# Altium PCB SWS_LEFT.PcbDoc (part 1 of 2)
Units mm, origin at the board's own origin, x right, y up, seen from the top; angles counter-clockwise.
Board outline 46.01 x 38 mm, 4 copper layers (Top Layer, Layer 1, Layer 2, Bottom Layer), stack 0.603 mm thick; 110 components, 82 nets, 355 pads, 130 vias.
Unrouted connection lines stored in the file: 5.
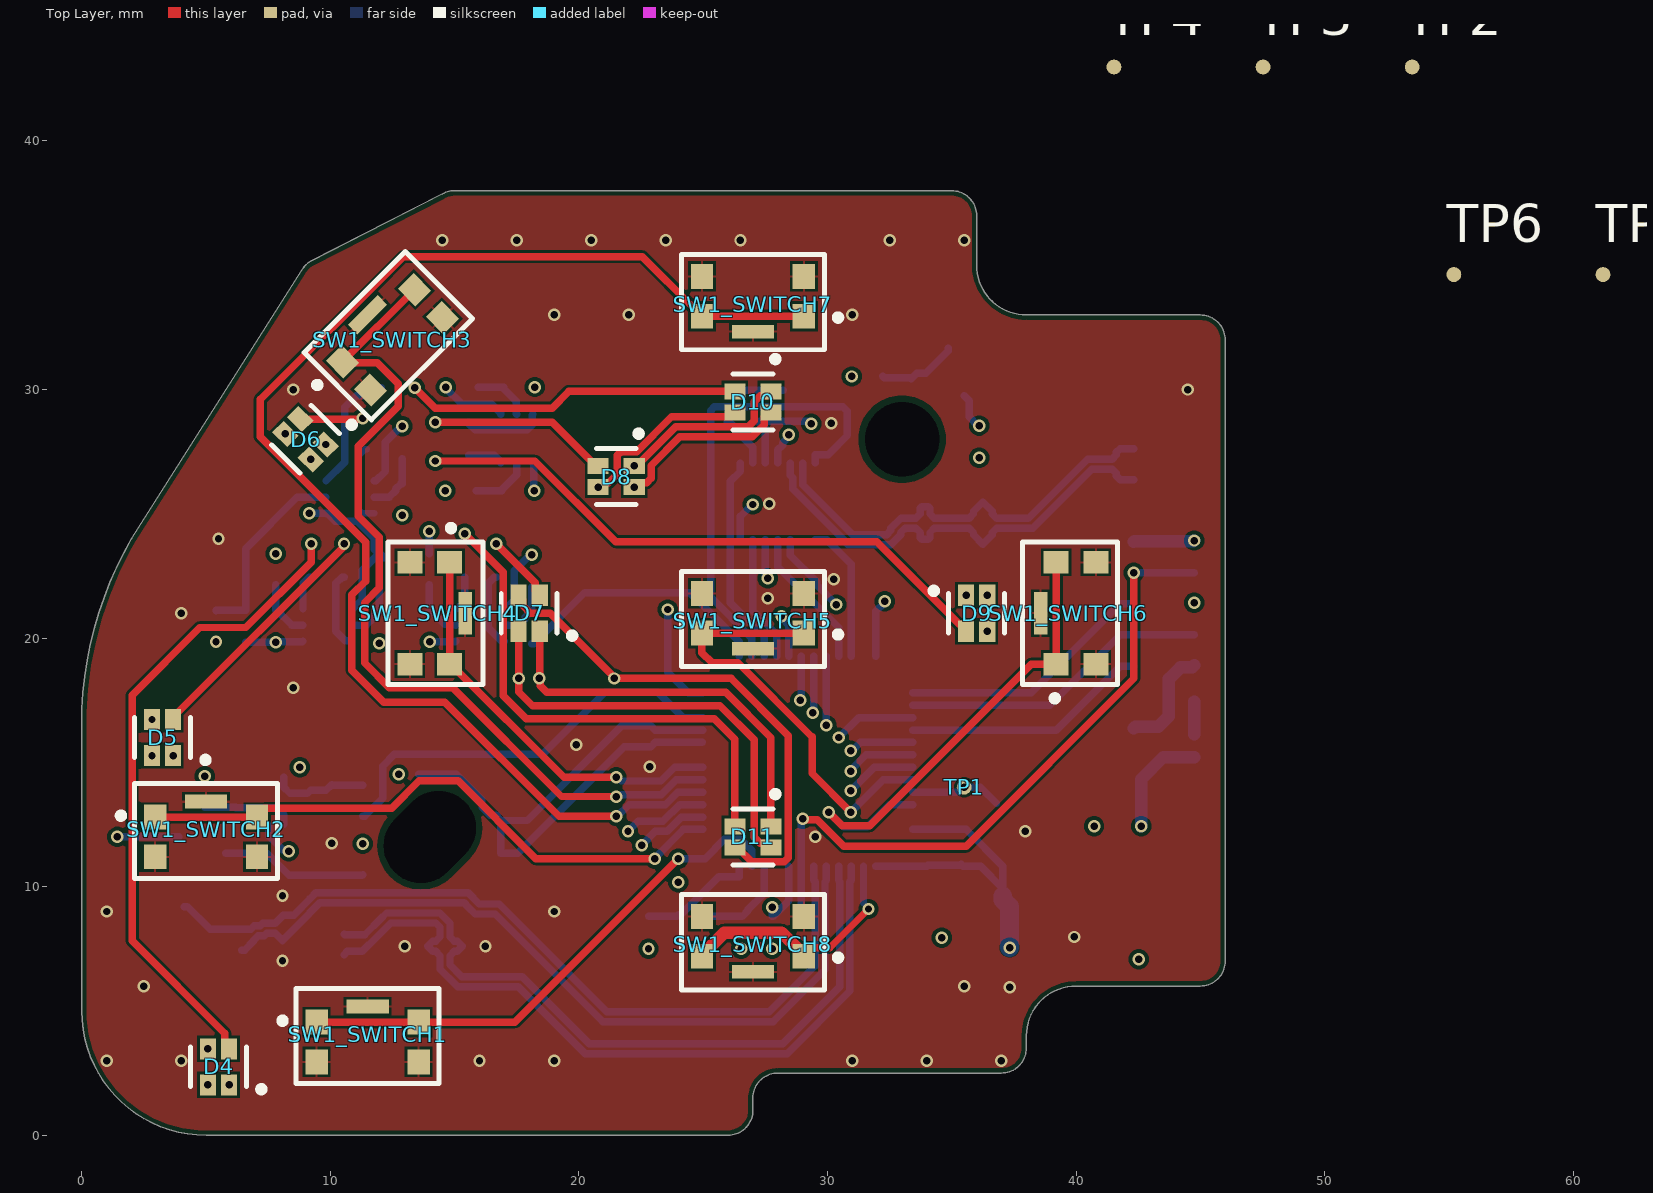
[diagram p0: Top Layer view]
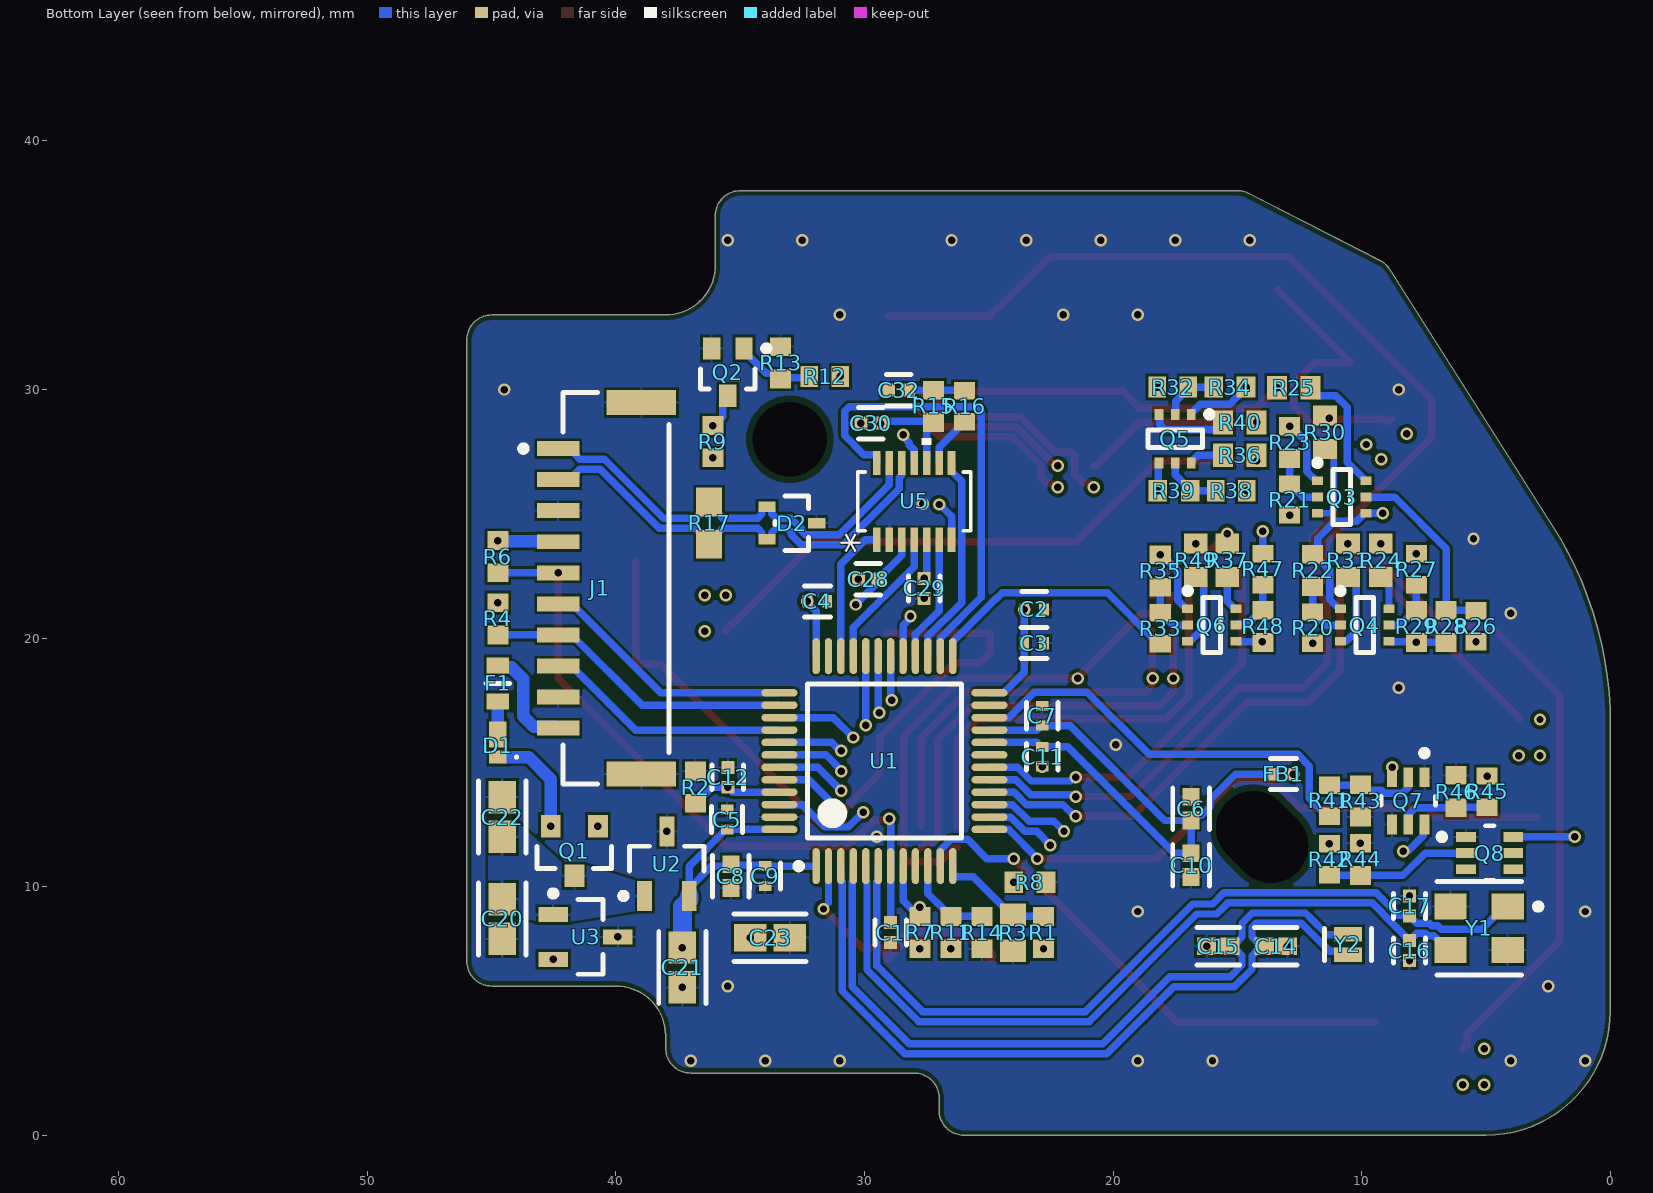
[diagram p1: Bottom Layer view, seen from below]
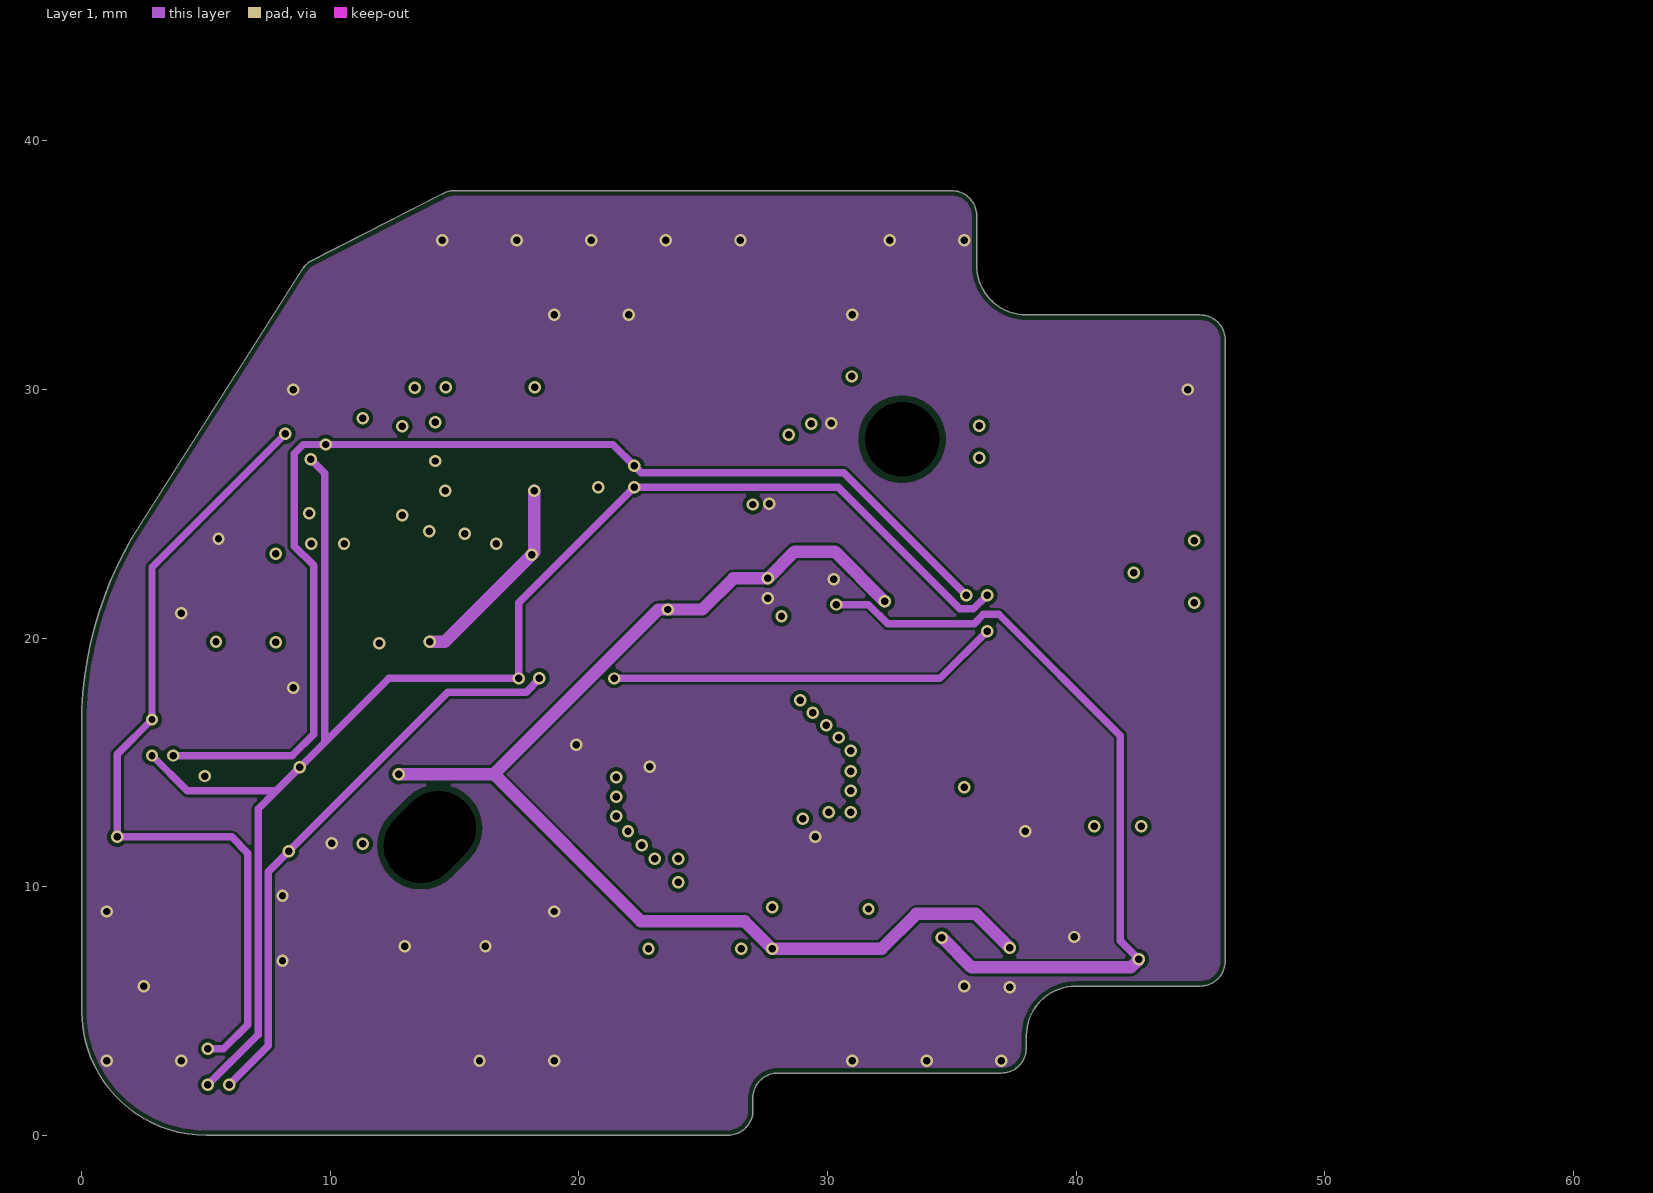
[diagram p2: Layer 1]
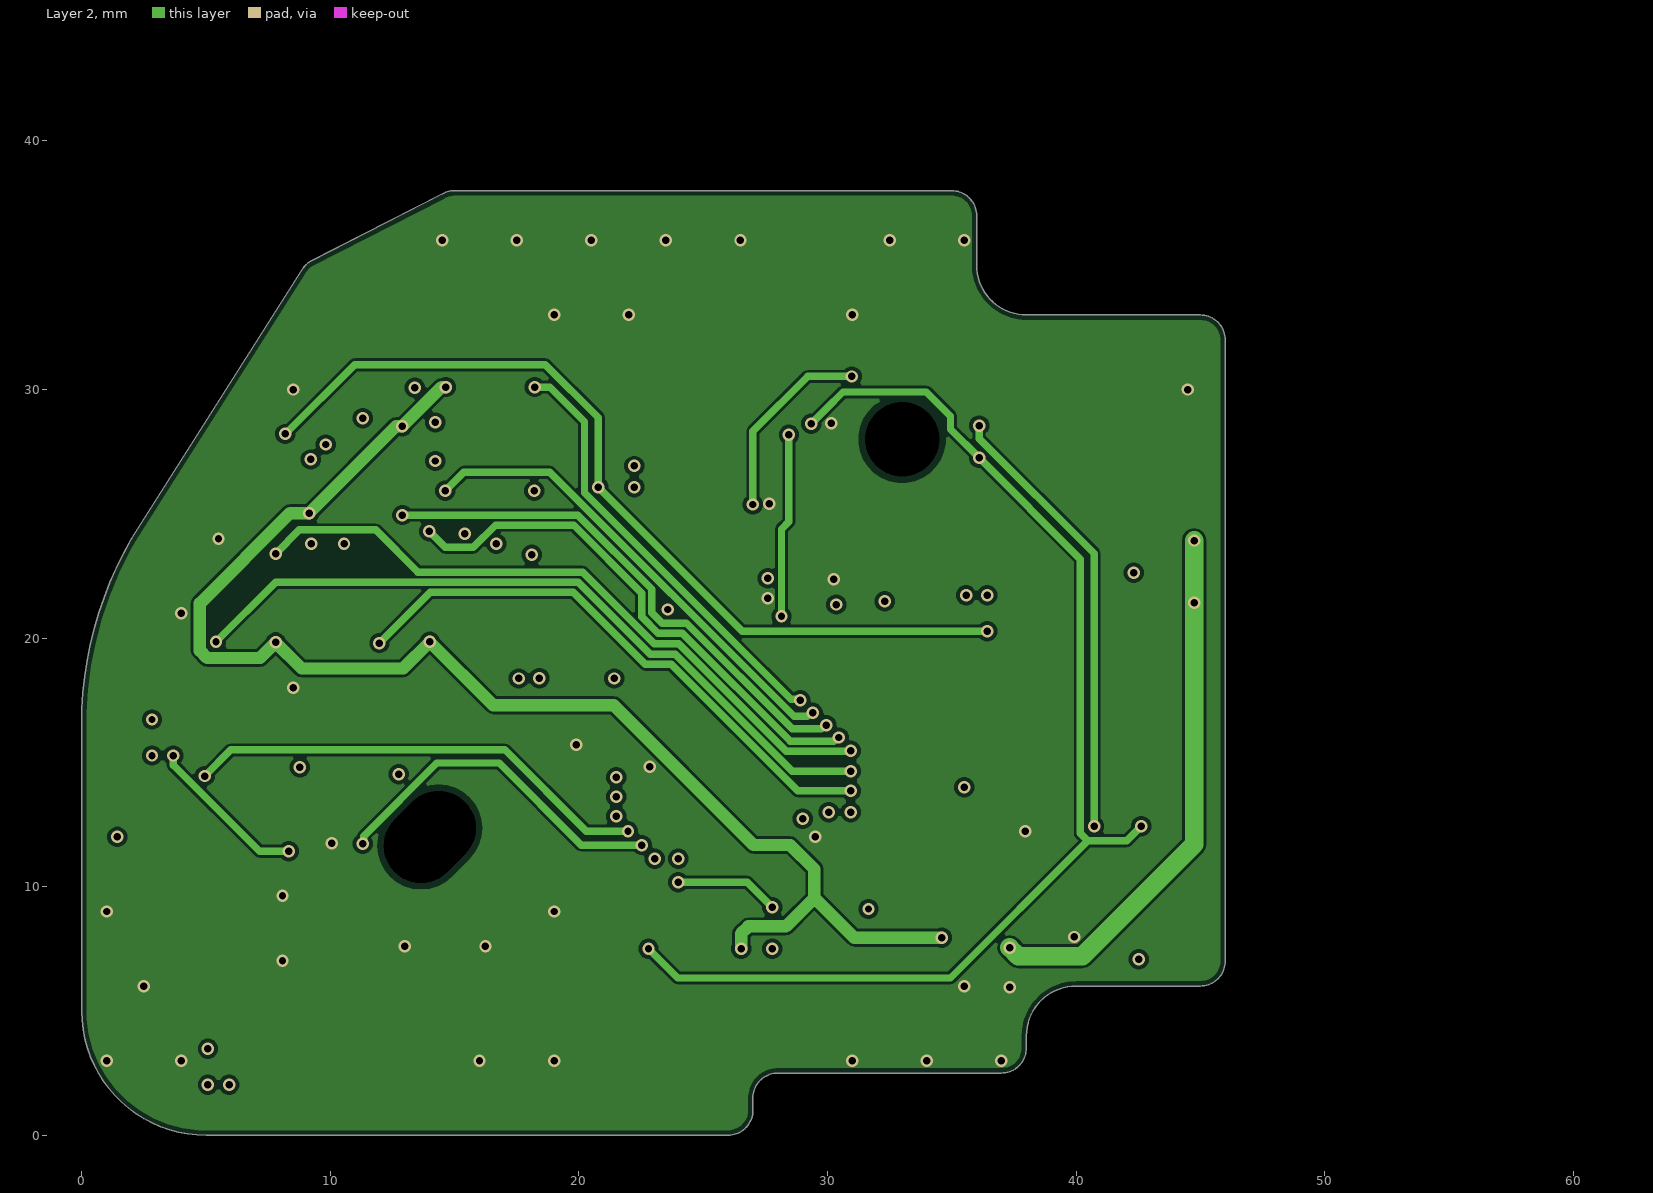
[diagram p3: Layer 2]
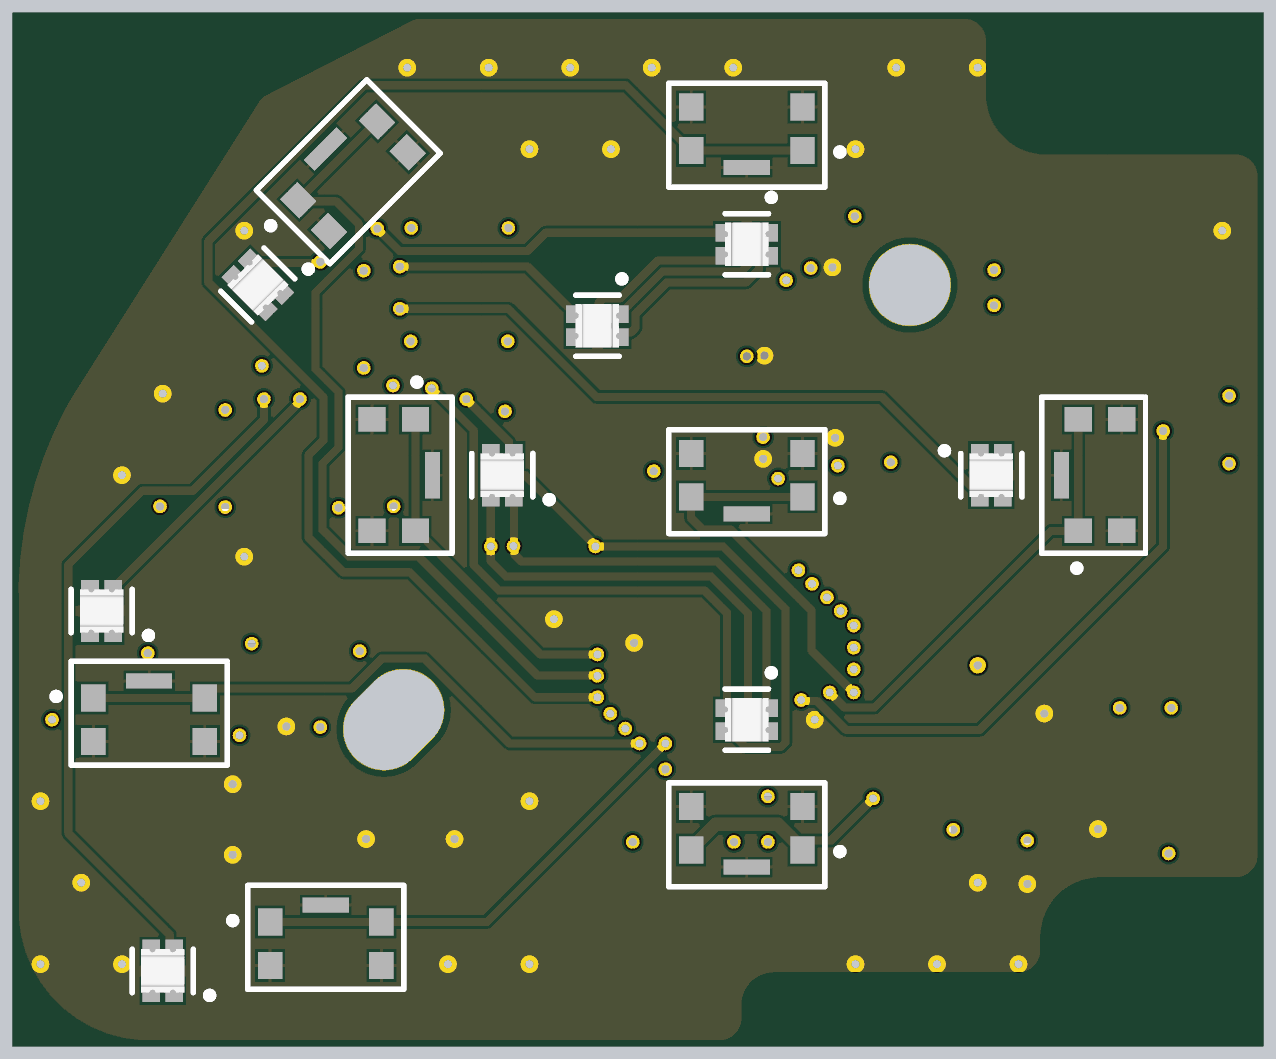
[diagram p5: 3D render of the assembled board from above, using the file's embedded part models]
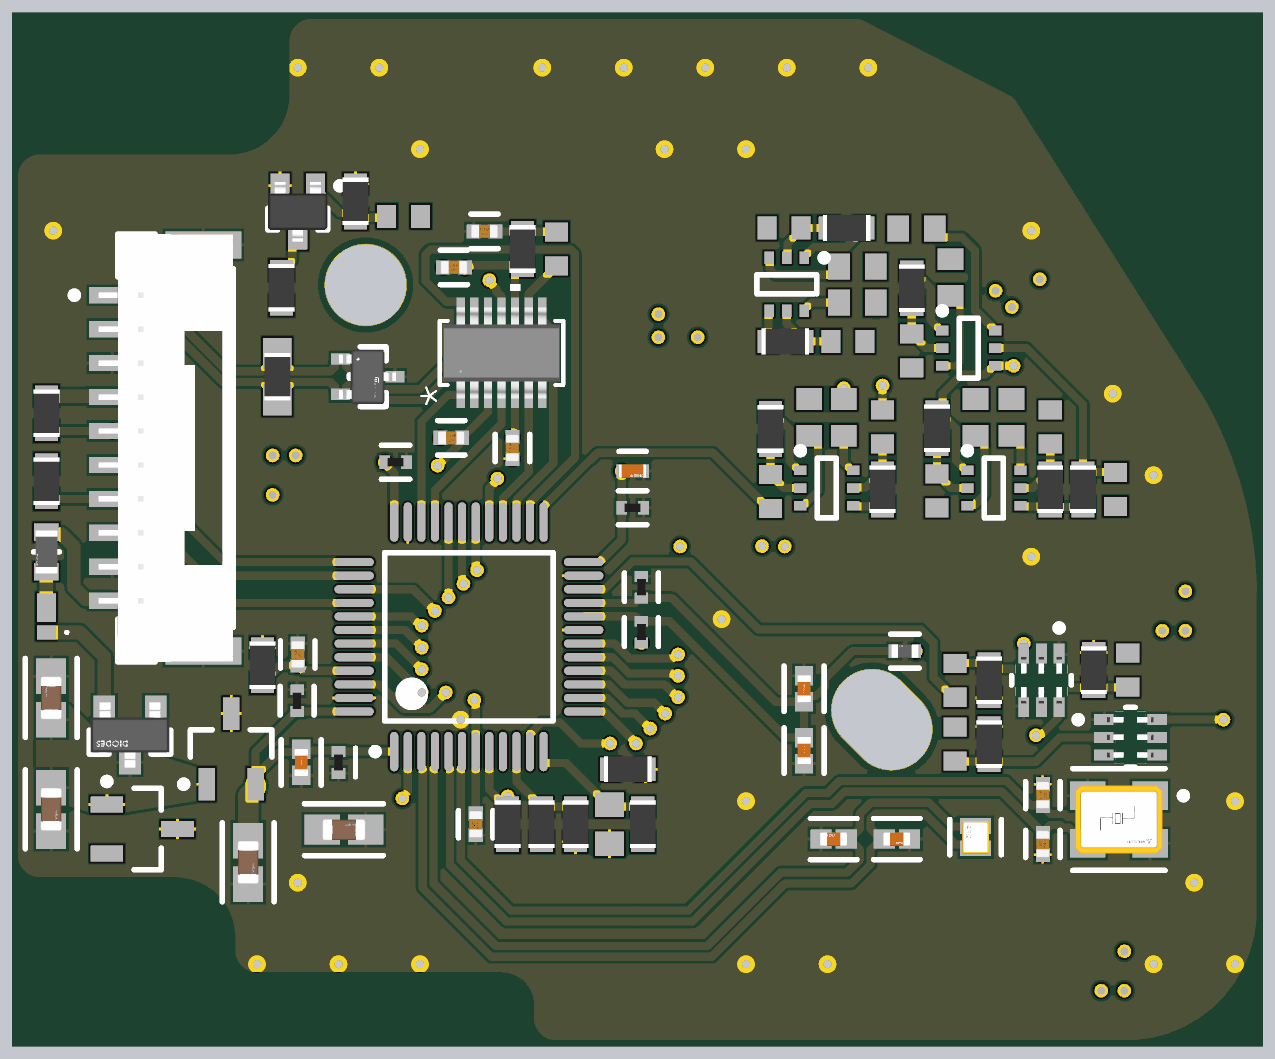
[diagram p6: 3D render of the assembled board from below, using the file's embedded part models]

## Layer stack, top to bottom
Top Solder: solder mask 0.0102, Solder Resist, Dk 3.5
Top Layer: signal copper 0.0356
Dielectric 2: prepreg 0.0711, PP-006, Dk 4.1
Layer 1: signal copper 0.035
Dielectric 1: dielectric 0.32, FR-4, Dk 4.8
Layer 2: signal copper 0.035
Dielectric 3: prepreg 0.0711, PP-006, Dk 4.1
Bottom Layer: signal copper 0.0356
Bottom Solder: solder mask 0.0102, Solder Resist, Dk 3.5

## Board outline
0,5 ccw(c5,5) 5,0 26,0 ccw(c26,1) 27,1 27,1.5 cw(c28,1.5) 28,2.5 37,2.5 ccw(c37,3.5) 38,3.5 38,4 cw(c40,4) 40,6 45,6 ccw(c45,7) 46,7 46,32 ccw(c45,32) 45,33 38,33 cw(c38,35) 36,35 36,37 ccw(c35,37) 35,38 15,38 ccw(c15,37) 14.5,37.866 9.207,35.159 ccw(c9.707,34.293) 8.841,34.793 2,24 ccw(c14.99,16.5) -0.01,16.5 0,16.5

## Design rules (kind name [scope] priority, off if disabled: settings)
BoardOutlineClearance [All] p1: gap=0.2 ignorepadtopadclearanceinfootprint=FALSE
Clearance [All] p1: gap=0.102 ignorepadtopadclearanceinfootprint=FALSE except(0.127: Arc-Via Track-Via SMDPad-Via THPad-Via Via-Via Via-Fill Via-Poly Via-Region Via-Text; 0.25: Arc-Hole Track-Hole SMDPad-Hole THPad-Hole Via-Hole Fill-Hole Poly-Hole Region-Hole Text-Hole)
ComponentClearance [All] p1: gap=0.102 collisioncheckmode=3 verticalgap=0.102 showdistances=TRUE
DiffPairsRouting [All] p1: maxlimit=0.102 minlimit=0.102 mostfreqgap=0.102 toplayer_minwidth=0.102 toplayer_maxwidth=1816.048 toplayer_prefwidth=0.102 midlayer1_minwidth=0.102 midlayer1_maxwidth=1816.048 midlayer1_prefwidth=0.102 midlayer2_minwidth=0.102 midlayer2_maxwidth=1816.048 midlayer2_prefwidth=0.102 bottomlayer_minwidth=0.102 bottomlayer_maxwidth=1816.048 bottomlayer_prefwidth=0.102 maxuncoupledlength=12.7
Height [All] p1: minheight=0 maxheight=1816.048 prefheight=12.7
HoleSize [All] p1: absolutevalues=TRUE maxlimit=6.3 minlimit=0.2 maxpercent=80.000 minpercent=20.000
HoleToHoleClearance [All] p1: gap=0.25 allowstackedmicrovias=FALSE
MinimumAnnularRing [All] p1: minimumring=0.076
MinimumSolderMaskSliver [All] p1: minsoldermaskwidth=0
PlaneClearance [All] p1: clearance=0.102
PlaneConnect PlaneConnectPowerPads [InPadClass('PowerPads')] p1: planeconnectstyle=Direct reliefexpansion=0.508 reliefentries=4 reliefconductorwidth=0.254 reliefairgap=0.254
PlaneConnect [All] p2: pad.planeconnectstyle=Relief pad.reliefexpansion=0.3 pad.reliefentries=4 pad.reliefconductorwidth=0.102 pad.reliefairgap=0.102 via.planeconnectstyle=Direct via.reliefexpansion=0.3 via.reliefentries=4 via.reliefconductorwidth=0.127 via.reliefairgap=0.127
PolygonConnect PolygonConnectPowerPads [All vs (InPadClass('PowerPads'))] p1: connectstyle=Direct reliefconductorwidth=0.254 reliefentries=4 polygonreliefangle="90 Angle" airgapwidth=0.254
PolygonConnect [All] p2: thpad.connectstyle=Relief thpad.reliefconductorwidth=0.102 thpad.reliefentries=4 thpad.polygonreliefangle="90 Angle" thpad.airgapwidth=0.102 smdpad.connectstyle=Relief smdpad.reliefconductorwidth=0.102 smdpad.reliefentries=4 smdpad.polygonreliefangle="90 Angle" smdpad.airgapwidth=0.102 via.connectstyle=Direct via.reliefconductorwidth=0.127 via.reliefentries=4 via.polygonreliefangle="90 Angle" via.airgapwidth=0.127
RoutingVias [All] p1: holewidth=0.2 width=0.45 viastyle="Through Hole" minholewidth=0.2 minwidth=0.45 maxholewidth=6.3 maxwidth=6.55
SilkToSilkClearance [All] p1: silktosilkclearance=0
SilkToSolderMaskClearance [IsPad] p1: minsilkscreentomaskgap=0.102 clearancetoexposedcopper=TRUE
SolderMaskExpansion [All] p1: expansion=0.075 istentingtop=FALSE
Width [All] p1: maxlimit=1816.048 minlimit=0.102 preferedwidth=0.102
20 further rules are at their usual default settings.

## Classes and differential pairs
component class LED_ARRAY: D4 D5 D6 D7 D8 D9 D10 D11 Q3 Q4 Q5 Q6 Q7 Q8 R20 R21 R22 R23 R24 R25 R26 R27 R28 R29 R30 R31 R32 R33 R34 R35 R36 R37 R38 R39 R40 R41 R42 R43 R44 R45 R46 R47 R48 R49
differential pair class 120DIFF: CAN
channel class SWITCH: SWITCH1 SWITCH2 SWITCH3 SWITCH4 SWITCH5 SWITCH6 SWITCH7 SWITCH8
component class SWITCH8: SW1_SWITCH8
component class SWITCH7: SW1_SWITCH7
component class SWITCH6: SW1_SWITCH6
component class SWITCH5: SW1_SWITCH5
component class SWITCH4: SW1_SWITCH4
component class SWITCH3: SW1_SWITCH3
component class SWITCH2: SW1_SWITCH2
component class SWITCH1: SW1_SWITCH1
component class STEERING_WHEEL_SWITCHES: J1
component class PWR_MGMT: C20 C21 C22 C23 D1 F1 Q1 Q2 R1 R3 R7 R8 R9 R11 R12 R13 R14 U2 U3
component class MCU: C1 C2 C3 C4 C5 C6 C7 C8 C9 C10 C11 C12 C14 C15 C16 C17 FB1 R2 R4 R6 TP1 TP2 TP3 TP4 U1 Y1 Y2
component class CAN_IF: C28 C29 C30 C32 D2 R15 R16 R17 TP5 TP6 U5
differential pair X: +X_P -X_N
differential pair X32: +X32_P -X32_N
differential pair CAN: +CAN_P -CAN_N

## Components (designator, comment, footprint, x,y, rotation, side; value= is the part's Value field where it differs from the comment)
C1 "C0402C104K8PACTU" FP-C0402-BB-MFG 28.95,8.15 r270 bottom value="0.10 μF"
C2 "C1005X5R1A475K050BC" FP-C1005-050-0_15-MFG 23.175,21.15 r180 bottom
C3 "GRM155R71C104KA88D" FP-GRM15-MFG 23.175,19.8 r0 bottom value=0.10μF
C4 "GRM155R71C104KA88D" FP-GRM15-MFG 31.9,21.475 r0 bottom value=0.10μF
C5 "GRM155R71C104KA88D" FP-GRM15-MFG 35.525,12.7 r270 bottom value=0.10μF
C6 "EMK105BJ105KV-F" FP-0402-L_1_0_0_05-W_0_5-IPC_A 16.864,13.139 r90 bottom
C7 "GRM155R71C104KA88D" FP-GRM15-MFG 22.85,16.875 r270 bottom value=0.10μF
C8 "EMK105BJ105KV-F" FP-0402-L_1_0_0_05-W_0_5-IPC_A 35.375,10.425 r270 bottom
C9 "GRM155R71C104KA88D" FP-GRM15-MFG 34,10.425 r90 bottom value=0.10μF
C10 "EMK105BJ105KV-F" FP-0402-L_1_0_0_05-W_0_5-IPC_A 16.864,10.864 r270 bottom
C11 "GRM155R71C104KA88D" FP-GRM15-MFG 22.85,15.225 r90 bottom value=0.10μF
C12 "C0402C104K8PACTU" FP-C0402-BB-MFG 35.5,14.4 r90 bottom value="0.10 μF"
C14 "04025A180FAT2A" FP-0402-L_1_0_1-W_0_5_0_1-IPC_A 13.45,7.606 r180 bottom
C15 "04025A180FAT2A" FP-0402-L_1_0_1-W_0_5_0_1-IPC_A 15.775,7.606 r0 bottom
C16 "C0402C689C5GACTU" FP-C0402-BB-MFG 8.075,7.425 r270 bottom value="6.8 pF"
C17 "C0402C689C5GACTU" FP-C0402-BB-MFG 8.075,9.225 r90 bottom value="6.8 pF"
C20 "GRM188R61E106KA73D" FP-GRM188-0_2-IPC_A 44.575,8.7 r270 bottom
C21 "GRM188R61E106KA73D" FP-GRM188-0_2-IPC_A 37.325,6.75 r270 bottom
C22 "GRM188R61E106KA73D" FP-GRM188-0_2-IPC_A 44.575,12.801 r90 bottom
C23 "GRM188R61E106KA73D" FP-GRM188-0_2-IPC_A 33.8,7.95 r180 bottom
C28 "C0402C104K8PACTU" FP-C0402-BB-MFG 29.85,22.375 r180 bottom value="0.10 μF"
C29 "C0402C104K8PACTU" FP-C0402-BB-MFG 27.6,22 r90 bottom value="0.10 μF"
C30 "C0402C104K8PACTU" FP-C0402-BB-MFG 29.75,28.65 r180 bottom value="0.10 μF"
C32 "C0402C104K8PACTU" FP-C0402-BB-MFG 28.625,29.975 r180 bottom value="0.10 μF"
D1 "NSR20F20NXT5G" ONSC-DSN-2-512AB-01_V 44.75,15.85 r0 bottom
D2 "ESDCAN02-2BWY" FP-SOT323-3L-MFG 32.925,24.625 r180 bottom value=3pF
D4 "LTST-C19HE1WT" FP-LTST-C19HE1WT-MFG 5.5,2.75 r180 top locked
D5 "LTST-C19HE1WT" FP-LTST-C19HE1WT-MFG 3.25,16 r180 top
D6 "LTST-C19HE1WT" FP-LTST-C19HE1WT-MFG 9,28 r225 top
D7 "LTST-C19HE1WT" FP-LTST-C19HE1WT-MFG 18,21 r180 top locked
D8 "LTST-C19HE1WT" FP-LTST-C19HE1WT-MFG 21.5,26.5 r270 top locked
D9 "LTST-C19HE1WT" FP-LTST-C19HE1WT-MFG 36,21 r0 top locked
D10 "LTST-C19HE1WT" FP-LTST-C19HE1WT-MFG 27,29.5 r270 top locked
D11 "LTST-C19HE1WT" FP-LTST-C19HE1WT-MFG 27,12 r270 top locked
F1 "ERB-RE1R00V" FP-ERBRE-MFG 44.75,18.175 r270 bottom
FB1 "BLM15PX601SN1D" FP-BLM15-0_05-MFG 13.15,14.525 r0 bottom
J1 "BM10B-GHS-TBT(LF)(SN)" FP-BM10B-GHS-TBT_LF_SN-MFG 40,22 r90 bottom
Q1 "DMP2123L-7" FP-SOT23-MFG 41.675,11.435 r270 bottom
Q2 "BSS138W-7-F" DIOD-SOT323-3_V 35.5,30.7 r270 bottom
Q3 "BSS84AKS,115" NXP-SOT363_L 10.8,25.675 r180 bottom
Q4 "BSS84AKS,115" NXP-SOT363_L 9.875,20.525 r180 bottom
Q5 "BSS84AKS,115" NXP-SOT363_L 17.5,28.025 r270 bottom
Q6 "BSS84AKS,115" NXP-SOT363_L 16.025,20.525 r180 bottom
Q7 "SSM6N7002KFU,LF" FP-SSOP6-P-0_65A-MFG 8.125,13.45 r270 bottom
Q8 "SSM6N7002KFU,LF" FP-SSOP6-P-0_65A-MFG 4.85,11.35 r180 bottom
R1 "ERJ3EKF1002V" RESC1609X55X30LL15T15 22.8,8.15 r270 bottom
R2 "ERJ3EKF1002V" RESC1609X55X30LL15T15 36.8,14 r270 bottom
R3 "ERJ-3EKF2001V" RESC1608X55X30ML15T15 24.025,8.15 r90 bottom
R4 "ERJ3EKF1002V" RESC1609X55X30LL15T15 44.75,20.775 r270 bottom
R6 "ERJ3EKF1002V" RESC1609X55X30LL15T15 44.75,23.275 r270 bottom
R7 "ERJ3EKF1002V" RESC1609X55X30LL15T15 27.775,8.15 r270 bottom
R8 "ERJ3EKF1002V" RESC1609X55X30LL15T15 23.35,10.175 r0 bottom
R9 "ERJ3EKF1002V" RESC1609X55X30LL15T15 36.1,27.9 r270 bottom
R11 "ERJ3EKF1002V" RESC1609X55X30LL15T15 26.525,8.15 r270 bottom
R12 "ERJ-3EKF1001V" RESC1608X55X30LL15T15 31.6,30.525 r180 bottom
R13 "ERJ3EKF1002V" RESC1609X55X30LL15T15 33.375,31.075 r270 bottom
R14 "ERJ3EKF1002V" RESC1609X55X30LL15T15 25.275,8.15 r270 bottom
R15 "ERJ3EKF1002V" RESC1609X55X30LL15T15 27.225,29.325 r90 bottom
R16 "ERJ-3EKF1001V" RESC1608X55X30LL15T15 25.975,29.325 r90 bottom
R17 "ERJ-3EKF1200V" RESC1609X55X30ML15T15 36.25,24.625 r270 bottom
R20 "ERJ-3EKF1001V" RESC1608X55X30LL15T15 11.975,20.425 r90 bottom
R21 "ERJ-3EKF1001V" RESC1608X55X30LL15T15 12.9,25.575 r90 bottom
R22 "ERJ3EKF1002V" RESC1609X55X30LL15T15 11.975,22.725 r270 bottom
R23 "ERJ3EKF1002V" RESC1609X55X30LL15T15 12.9,27.875 r270 bottom
R24 "ERJ-3EKF91R0V" RESC1608X55X30NL15T15 9.225,23.125 r90 bottom
R25 "ERJ-3EKF91R0V" RESC1608X55X30NL15T15 12.725,30.075 r0 bottom
R26 "ERJ-3EKF1001V" RESC1608X55X30LL15T15 5.4,20.475 r90 bottom
R27 "ERJ-3EKF1001V" RESC1608X55X30LL15T15 7.8,22.775 r270 bottom
R28 "ERJ3EKF1002V" RESC1609X55X30LL15T15 6.6,20.475 r90 bottom
R29 "ERJ3EKF1002V" RESC1609X55X30LL15T15 7.8,20.475 r90 bottom
R30 "ERJ-3EKF91R0V" RESC1608X55X30NL15T15 11.475,28.275 r90 bottom
R31 "ERJ-3EKF91R0V" RESC1608X55X30NL15T15 10.55,23.125 r90 bottom
R32 "ERJ-3EKF1001V" RESC1608X55X30LL15T15 17.6,30.1 r180 bottom
R33 "ERJ-3EKF1001V" RESC1608X55X30LL15T15 18.1,20.4 r90 bottom
R34 "ERJ3EKF1002V" RESC1609X55X30LL15T15 15.3,30.1 r0 bottom
R35 "ERJ3EKF1002V" RESC1609X55X30LL15T15 18.1,22.7 r270 bottom
R36 "ERJ-3EKF91R0V" RESC1608X55X30NL15T15 14.9,27.35 r180 bottom
R37 "ERJ-3EKF91R0V" RESC1608X55X30NL15T15 15.4,23.125 r90 bottom
R38 "ERJ-3EKF1001V" RESC1608X55X30LL15T15 15.25,25.925 r0 bottom
R39 "ERJ3EKF1002V" RESC1609X55X30LL15T15 17.55,25.925 r180 bottom
R40 "ERJ-3EKF91R0V" RESC1608X55X30NL15T15 14.9,28.675 r180 bottom
R41 "ERJ-3EKF1001V" RESC1608X55X30LL15T15 11.3,13.45 r90 bottom
R42 "ERJ-3EKF1001V" RESC1608X55X30LL15T15 11.3,11.1 r270 bottom
R43 "ERJ3EKF1002V" RESC1609X55X30LL15T15 10.05,13.45 r90 bottom
R44 "ERJ3EKF1002V" RESC1609X55X30LL15T15 10.05,11.1 r270 bottom
R45 "ERJ-3EKF1001V" RESC1608X55X30LL15T15 4.95,13.825 r270 bottom
R46 "ERJ3EKF1002V" RESC1609X55X30LL15T15 6.2,13.825 r270 bottom
R47 "ERJ-3EKF1001V" RESC1608X55X30LL15T15 13.975,22.775 r270 bottom
R48 "ERJ3EKF1002V" RESC1609X55X30LL15T15 13.975,20.475 r90 bottom
R49 "ERJ-3EKF91R0V" RESC1608X55X30NL15T15 16.675,23.125 r90 bottom
SW1_SWITCH1 "KMR211GLFS" FP-KMR211GLFS-MFG 11.5,3.75 r0 top locked (schematic designator SW1)
SW1_SWITCH2 "KMR211GLFS" FP-KMR211GLFS-MFG 5,12 r0 top locked (schematic designator SW1)
SW1_SWITCH3 "KMR211GLFS" FP-KMR211GLFS-MFG 12.5,32 r45 top locked (schematic designator SW1)
SW1_SWITCH4 "KMR211GLFS" FP-KMR211GLFS-MFG 14,21 r270 top (schematic designator SW1)
SW1_SWITCH5 "KMR211GLFS" FP-KMR211GLFS-MFG 27,21 r180 top (schematic designator SW1)
SW1_SWITCH6 "KMR211GLFS" FP-KMR211GLFS-MFG 40,21 r90 top locked (schematic designator SW1)
SW1_SWITCH7 "KMR211GLFS" FP-KMR211GLFS-MFG 27,33.75 r180 top (schematic designator SW1)
SW1_SWITCH8 "KMR211GLFS" FP-KMR211GLFS-MFG 27,8 r180 top locked (schematic designator SW1)
TP1 "TPAD6R" TP06R 35.5,14 r90 top
TP2 "TPAD6R" TP06R 53.525,42.975 r90 top
TP3 "TPAD6R" TP06R 47.525,42.975 r90 top
TP4 "TPAD6R" TP06R 41.525,42.975 r90 top
TP5 "TPAD6R" TP06R 61.2,34.625 r90 top
TP6 "TPAD6R" TP06R 55.2,34.625 r90 top
U1 "STM32G431C6T6" TSQFP50P900X900X160-48N 29.2,15.05 r90 bottom
U2 "AP7375-33SA-7" SOT90P285X110-3N 37.95,10.925 r90 bottom
U3 "AP7375-50SA-7" AP7375-50SA-7-Footprint-1 41.225,7.975 r180 bottom
U5 "TCAN1146DYYRQ1" TCAN1146DYYRQ1-Footprint-1 28,25.5 r90 bottom
Y1 "ABM8-48.000MHZ-B2-T" FP-ABM8-MFG 5.275,8.325 r0 bottom
Y2 "ECS-.327-12.5-1210-TR" FP-ECX-1210-MFG 10.55,7.675 r90 bottom

## Footprints (in the part's own frame and the unit in brackets; to place one, negate y for a bottom-side part, rotate by r counter-clockwise, add the part's x,y. Pads: shape width x height; smd on the part's side, far side on the other; paste and mask are expansions set on the pad)
AP7375-50SA-7-Footprint-1 [mm]
  rect 1.2x0.6 smd: 1(-1.3,0.9) 2(-1.3,-0.9) 3(1.3,0)
  silkscreen extent -1.43,-1.5 0.7,1.87, body extent -0.7,-1.5 0.7,1.5, height 1.1
DIOD-SOT323-3_V [mm] "SOT323, 3-Leads, Body 2.2x1.35mm, Pitch 0.65mm"
  rect 0.9x0.7 smd: 1(-0.95,0.65) 2(-0.95,-0.65) 3(0.95,0)
  silkscreen extent -1.07,-1.1 0.67,1.67, body extent -1.1,-1.1 1.1,1.1, height 1.07
FP-0402-L_1_0_0_05-W_0_5-IPC_A [mm]
  rect 0.715x0.672 smd paste+0 mask+0: 1(-0.479,0) 2(0.479,0)
  silkscreen extent -0.84,-0.74 0.84,0.74, body extent -0.5,-0.25 0.5,0.25, height 0.55
FP-0402-L_1_0_1-W_0_5_0_1-IPC_A [mm]
  rect 0.781x0.712 smd paste+0 mask+0: 1(-0.466,0) 2(0.466,0)
  silkscreen extent -0.86,-0.76 0.86,0.76, body extent -0.5,-0.25 0.5,0.25, height 0.56
FP-ABM8-MFG [mm]
  rect 1.3x1.05 smd paste+0 mask+0: 1(-1.15,-0.875) 2(1.15,-0.875) 3(1.15,0.875) 4(-1.15,0.875)
  silkscreen extent -2.5,-1.88 1.7,1.88, body extent -1.6,-1.25 1.6,1.25, height 0.8
FP-BLM15-0_05-MFG [mm]
  rect 0.4x0.5 smd paste+0 mask+0: 1(-0.4,0) 2(0.4,0)
  silkscreen extent -0.53,-0.63 0.52,0.63, body extent -0.5,-0.25 0.5,0.25, height 0.55
FP-BM10B-GHS-TBT_LF_SN-MFG [mm]
  rect 0.6x1.7 smd paste+0 mask+0: 1(5.625,2.325) 2(4.375,2.325) 3(3.125,2.325) 4(1.875,2.325) 5(0.625,2.325) 6(-0.625,2.325) 7(-1.875,2.325) 8(-3.125,2.325) 9(-4.375,2.325) 10(-5.625,2.325)
  rect 1x2.8 smd paste+0 mask+0: 11(-7.475,-1.025) 12(7.475,-1.025)
  silkscreen extent -7.88,-2.12 7.88,3.85, body extent -7.88,-2.12 7.88,2.83, height 4.2
FP-C0402-BB-MFG [mm]
  rect 0.52x0.52 smd paste+0 mask+0: 1(-0.4,0) 2(0.4,0)
  silkscreen extent -0.5,-0.64 0.5,0.64, body extent -0.5,-0.25 0.5,0.25, height 0.55
FP-C1005-050-0_15-MFG [mm]
  rect 0.4x0.5 smd paste+0 mask+0: 1(-0.4,0) 2(0.4,0)
  silkscreen extent -0.5,-0.72 0.5,0.72, body extent -0.5,-0.25 0.5,0.25, height 0.55
FP-ECX-1210-MFG [mm]
  rect 0.575x1.14 smd paste+0 mask+0: 1(-0.413,0) 2(0.413,0)
  silkscreen extent -0.65,-0.95 0.65,0.95, body extent -0.6,-0.5 0.6,0.5, height 0.5
FP-ERBRE-MFG [mm]
  rect 0.65x0.9 smd: 1(-0.725,0) 2(0.725,0)
  silkscreen extent 0,-0.48 0,0.48, body extent -0.8,-0.4 0.8,0.4, height 0.65
FP-GRM15-MFG [mm]
  rect 0.4x0.5 smd paste+0 mask+0: 1(-0.4,0) 2(0.4,0)
  silkscreen extent -0.53,-0.63 0.53,0.63, body extent -0.3,-0.16 0.3,0.16, height 0.33
FP-GRM188-0_2-IPC_A [mm]
  rect 1.305x1.106 smd paste+0 mask+0: 1(-0.801,0) 2(0.801,0)
  silkscreen extent -1.45,-0.95 1.45,0.95, body extent -0.8,-0.4 0.8,0.4, height 1
FP-KMR211GLFS-MFG [mm]
  rect 0.9x1 smd paste+0 mask+0: 1(-2.05,0.8) 2(2.05,0.8) 3(-2.05,-0.8) 4(2.05,-0.8)
  rect 1.7x0.55 smd paste+0 mask+0: 5(0,1.425)
  silkscreen extent -3.55,-1.68 2.88,2.15
FP-LTST-C19HE1WT-MFG [mm]
  rect 0.65x0.85 smd paste+0 mask+0: 1(-0.425,0.725) 2(0.425,0.725) 3(0.425,-0.725) 4(-0.425,-0.725)
  silkscreen extent -1.85,-0.8 1.12,1.02, body extent -0.95,-1.25 0.95,1.25, height 0.25
FP-SOT23-MFG [mm]
  rect 0.9x0.8 smd paste+0 mask+0: 1(-1,0.95) 2(-1,-0.95) 3(1,0)
  silkscreen extent -0.18,-1.5 0.7,1.5, body extent -1.2,-1.45 1.2,1.45, height 1.1
FP-SOT323-3L-MFG [mm]
  rect 0.7x0.42 smd paste+0 mask+0: 1(-1,0.65) 2(-1,-0.65) 3(1,0)
  silkscreen extent -0.67,-1.1 0.67,1.1, body extent -1.05,-1 1.05,1, height 1.1
FP-SSOP6-P-0_65A-MFG [mm]
  rect 0.8x0.4 smd paste+0 mask+0: 1(-0.95,0.65) 2(-0.95,0) 3(-0.95,-0.65) 4(0.95,-0.65) 5(0.95,0) 6(0.95,0.65)
  silkscreen extent -2.05,-1.1 0.18,1.1, body extent -1.05,-1 1.05,1, height 1
NXP-SOT363_L [mm] "SOT23, 6-Leads, Body 2.2x1.35mm, Pitch 0.65mm, IPC High Density"
  rect 0.45x0.35 smd: 1(-0.975,0.65) 2(-0.975,0) 3(-0.975,-0.65) 4(0.975,-0.65) 5(0.975,0) 6(0.975,0.65)
  silkscreen extent -1.1,-1.1 0.35,1.5, body extent -0.67,-1.1 0.67,1.1, height 1.1
ONSC-DSN-2-512AB-01_V [mm] "DSN, 2-Leads, Body 1.6x0.8mm"
  rect 0.7x0.52 smd: 1(0,0.64)
  rect 0.7x1.05 smd: 2(0,-0.275)
  silkscreen extent -0.8,0.59 -0.7,0.69, body extent -0.4,-0.8 0.4,0.8, height 0.31
RESC1608X55X30LL15T15 [mm] "Chip Resistor, 2-Leads, Body 1.60x0.80mm, IPC High Density"
  rect 0.7x0.85 smd: 1(-0.625,0) 2(0.625,0)
  body extent -0.87,-0.48 0.87,0.48, height 0.55
RESC1608X55X30ML15T15 [mm] "Chip Resistor, 2-Leads, Body 1.60x0.80mm, IPC Low Density"
  rect 0.9x1.05 smd: 1(-0.725,0) 2(0.725,0)
  body extent -0.87,-0.48 0.87,0.48, height 0.55
RESC1608X55X30NL15T15 [mm] "Chip Resistor, 2-Leads, Body 1.60x0.80mm, IPC Medium Density"
  rect 0.8x0.95 smd: 1(-0.675,0) 2(0.675,0)
  body extent -0.87,-0.48 0.87,0.48, height 0.55
RESC1609X55X30LL15T15 [mm] "Chip Resistor, 2-Leads, Body 1.75x0.95mm, IPC High Density"
  rect 0.75x0.85 smd: 1(-0.65,0) 2(0.65,0)
  body extent -0.87,-0.48 0.87,0.48, height 0.55
RESC1609X55X30ML15T15 [mm] "Chip Resistor, 2-Leads, Body 1.75x0.95mm, IPC Low Density"
  rect 1.15x1.05 smd: 1(-0.85,0) 2(0.85,0)
  body extent -0.87,-0.48 0.87,0.48, height 0.55
SOT90P285X110-3N [mm] "SOT23, 3-Leads, Body 2,95x2,85mm, Pitch 0,90mm, IPC Medium Density"
  rect 1.2x0.6 smd: 1(-1.3,0.9) 2(-1.3,-0.9) 3(1.3,0)
  silkscreen extent -1.42,-1.5 0.7,1.88, body extent -0.7,-1.5 0.7,1.5, height 1.1
TCAN1146DYYRQ1-Footprint-1 [mil]
  rect 38.5x12 smd paste+0 mask+0: 1(-60.75,59.07) 2(-60.75,39.38) 3(-60.75,19.69) 4(-60.75,0) 5(-60.75,-19.69) 6(-60.75,-39.38) 7(-60.75,-59.07) 8(60.75,-59.07) 9(60.75,-39.38) 10(60.75,-19.69) 11(60.75,0) 12(60.75,19.69) 13(60.75,39.38) 14(60.75,59.07)
  silkscreen extent -47,-90 100,90, body extent -66,-84 66,84, height 43
TP06R [mm] "Testpoint, round, d=0.6mm"
  round 0.6 smd paste-1: 1(0,0)
TSQFP50P900X900X160-48N [mm] "TSQFP, 48-Leads, Body 7,00x7,00mm, Pitch 0,50mm, IPC Medium Density"
  oval 1.45x0.3 smd: 1(-4.225,2.75) 2(-4.225,2.25) 3(-4.225,1.75) 4(-4.225,1.25) 5(-4.225,0.75) 6(-4.225,0.25) 7(-4.225,-0.25) 8(-4.225,-0.75) 9(-4.225,-1.25) 10(-4.225,-1.75) 11(-4.225,-2.25) 12(-4.225,-2.75) 25(4.225,-2.75) 26(4.225,-2.25) 27(4.225,-1.75) 28(4.225,-1.25) 29(4.225,-0.75) 30(4.225,-0.25) 31(4.225,0.25) 32(4.225,0.75) 33(4.225,1.25) 34(4.225,1.75) 35(4.225,2.25) 36(4.225,2.75)
  oval 0.3x1.45 smd: 13(-2.75,-4.225) 14(-2.25,-4.225) 15(-1.75,-4.225) 16(-1.25,-4.225) 17(-0.75,-4.225) 18(-0.25,-4.225) 19(0.25,-4.225) 20(0.75,-4.225) 21(1.25,-4.225) 22(1.75,-4.225) 23(2.25,-4.225) 24(2.75,-4.225) 37(2.75,4.225) 38(2.25,4.225) 39(1.75,4.225) 40(1.25,4.225) 41(0.75,4.225) 42(0.25,4.225) 43(-0.25,4.225) 44(-0.75,4.225) 45(-1.25,4.225) 46(-1.75,4.225) 47(-2.25,4.225) 48(-2.75,4.225)
  silkscreen extent -4.35,-3.1 3.1,3.58, body extent -3.5,-3.5 3.5,3.5, height 1.6

## Part data
C1 C12 C28 C29 C30 C32: library part CMP-2008-02046-2, "CAP CER 0.1UF 10V X5R 0402", Capacitance="0.10 μF", Manufacturer=Kemet, Package=C0402-BB, Temperature="-55°C to +125°C", Temperature Characteristic=X5R, Temperature Coefficient=15%, Temperature Range High=+125°C, Temperature Range Low=-55°C, Tolerance=0.1, Voltage Rating="10 V", Automotive=No, Category=Cap, ComponentLink2Description=Datasheet, ComponentLink2URL=https://content.kemet.com/datasheets/KEM_C1002_X7R_SMD.pdf, Device Class L1="Passive Components", Device Class L2=Capacitors, Device Class L3="Ceramic Capacitors", Digikey Description="CAP CER 0.1UF 10V X5R 0402", Height=0.55mm, Ipc Land Pattern Name=CAPC10050X50, Lead Free=Yes, Manufacturer Part Number=C0402C104K8PACTU, Material=Ceramic, Mouser Description="Capacitor 100 nF 10 VDC 0402", Octopart=https://octopart.com/c0402c104k8pactu-kemet-140039, RoHS=TRUE
C2: library part CMP-2000-05997-2, "CAP CER 4.7UF 10V X5R 0402", Capacitance=4.7uF, Case Code (Imperial)=0402, Case Code (Metric)=1005, Dielectric=X5R, Dielectric Material=Ceramic, Max Operating Temperature=85°C, Min Operating Temperature=-55°C, Package Quantity=10000, Tolerance=10%, Voltage Rating=10V, Case/Package=0402, Lead Free="Lead Free", Length=0.039inch, Mount="Surface Mount", Packaging="Cut Tape", REACH SVHC="No SVHC", RoHS Compliant=Yes, Series=C, Thickness=0.022inch, Voltage Rating (DC)=10V, Width=0.02inch
C3 C4 C5 C7 C9 C11: library part CMP-2100-03641-2, "CAP CER 0.1UF 16V X7R 0402", Capacitance=0.10μF, Manufacturer=Murata, Package=GRM15, Temperature="-55°C to +125°C", Temperature Characteristic=X7R, Temperature Range High=+125°C, Temperature Range Low=-55°C, Tolerance=10%, Voltage Rating=16Vdc, Category=Cap, ComponentLink2Description=Datasheet, ComponentLink2URL=https://search.murata.co.jp/Ceramy/image/img/A01X/G101/ENG/GRM155R71H471KA01-01A.pdf, Device Class L1="Passive Components", Device Class L2=Capacitors, Device Class L3="Ceramic Capacitors", Digikey Description="CAP CER 0.1UF 16V X7R 0402", Height=0.55mm, Ipc Land Pattern Name=CAPC10050X219, Lead Free=yes, Manufacturer Part Number=GRM155R71C104KA88D, Material=Ceramic, Mouser Description="0402 0.1 uF 16V ±10 % Tolerance X7R SMT Multilayer Ceramic Capacitor", Octopart=https://octopart.com/grm155r71c104ka88d-murata-196880, RoHS=TRUE, Standoff Height=0mm
C6 C8 C10: library part CMP-14477-000104-2, "None", Capacitance=1uF, Case Code (Imperial)=0402, Case Code (Metric)=1005, Dielectric=X5R, Max Operating Temperature=85°C, Min Operating Temperature=-55°C, Package Quantity=1, Tolerance=10%, Voltage Rating=16V, Case/Package=0402, Construction=Flat, Depth=0.5mm, Halogen Free="Halogen Free", Height=0.5mm, Length=1mm, Mount="Surface Mount", Number of Pins=2, Packaging="Tape and Reel", Radiation Hardening=No, RoHS Compliant=Yes, Series=M, Termination=SMD/SMT, Thickness=0.022inch, Voltage Rating (DC)=16V, Width=0.02inch
C14 C15: library part CMP-2008-02590-2, "General Purpose Ceramic Capacitor, 0402, 18pF, 1%, C0G, 30ppm/°C, 50V", Capacitance=18pF, Case Code (Imperial)=0402, Case Code (Metric)=1005, Dielectric=C0G, Max Operating Temperature=125°C, Min Operating Temperature=-55°C, Package Quantity=1, Tolerance=1%, Voltage Rating=50V, Case/Package=0402, Construction=Flat, Contact Plating=Tin, Depth=0.5mm, Lead Free="Lead Free", Length=1mm, Mount="Surface Mount", Number of Pins=2, Packaging="Tape and Reel", Radiation Hardening=No, REACH SVHC="No SVHC", RoHS Compliant=Yes, Series=-, Termination=SMD/SMT, Thickness=0.022inch, Voltage Rating (DC)=50V, Width=0.5mm
C16 C17: library part CMP-1034-00517-3, "CAP CER 6.8PF 50V NP0 0402", Capacitance="6.8 pF", Manufacturer=Kemet, Package=C0402-BB, Temperature="-55°C to +125°C", Temperature Characteristic=C0G, Temperature Coefficient=15%, Temperature Range High=+125°C, Temperature Range Low=-55°C, Tolerance="0.25 pF", Voltage Rating="50 V", Automotive=No, Category=Cap, ComponentLink2Description=Datasheet, ComponentLink2URL=https://content.kemet.com/datasheets/KEM_C1002_X7R_SMD.pdf, Device Class L1="Passive Components", Device Class L2=Capacitors, Device Class L3="Ceramic Capacitors", Digikey Description="CAP CER 6.8PF 50V NP0 0402", Height=0.55mm, Ipc Land Pattern Name=CAPC10050X50, Lead Free=Yes, Manufacturer Part Number=C0402C689C5GACTU, Material=Ceramic, Mouser Description="Cap Ceramic 6.8pF 50V C0G 0.25pF SMD 0402 125°C Paper T/R", Octopart=https://octopart.com/c0402c689c5gactu-kemet-9143567, RoHS=TRUE
C20 C21 C22 C23: library part CMP-06035-045268-1, "Chip Multilayer Ceramic Capacitors for General Purpose, 0603, 10uF, X5R, 15%, 10%, 25V", Case/Package=0603
D1: library part CMP-1055-00234-1, "Schottky Barrier Diode, 2-Pin DSN, Pb-Free, Tape and Reel", Manufacturer="On Semiconductor", ComponentLink1Description="Manufacturer URL", ComponentLink1URL=http://www.onsemi.com/, ComponentLink2Description=Datasheet, ComponentLink2URL=http://www.onsemi.com/pub_link/Collateral/NSR20F20-D.PDF, ComponentLink3Description="Package Specification", ComponentLink3URL=http://www.onsemi.cn/pub_link/Collateral/152AB.PDF, Configuration=Single, DatasheetVersion="Rev. 2", IFSM Max (A)=28, Mounting Technology="Surface Mount", PackageDescription="2-Pin Micro Molded Package, Body 1.6 x 0.8 mm", PackageReference=DSN-2-512AB-01, PackageVersion="Rev. B, 01/2011", Packing="Tape and Reel", PartNumber=NSR20F20NXT5G, RoHS=TRUE
D2: library part CMP-12225-000055-1, "TVS DIODE 26.5V 44V SOT323-3", Breakdown Voltage=28.5V, Capacitance=3pF, Clamping Voltage=44V, Manufacturer=STMicroelectronics, Max Junction Temp=+175°C, Package=SOT323-3L, Peak Pulse Current=3A, Peak Pulse Power=170W, Reverse Standoff Voltage=26.5V, Temperature="-55°C to +175°C", Temperature Range Low=-55°C, Automotive=Yes, Automotive Grade="Grade 0", Category=Diode, ComponentLink2Description=Datasheet, ComponentLink2URL=https://www.st.com/resource/en/datasheet/esdcan02-2bwy.pdf, Device Class L1="Circuit Protection", Device Class L2="TVS Diodes", Device Class L3=unset, Digikey Description="TVS DIODE 26.5V 44V SOT323-3", Direction=Bidirectional, Height=1.1mm, Ipc Land Pattern Name=SOT65P210X95-3, Lead Free=Yes, Manufacturer Part Number=ESDCAN02-2BWY, Mouser Description="TVS Diodes / ESD Suppressors Automotive dual-line Transil, Transient voltage suppressor (TVS) for CAN bus", Number of Channels=2, Octopart=https://octopart.com/esdcan02-2bwy-stmicroelectronics-58631133, RoHS=TRUE, Standoff Height=0mm, Temperature Range High=+175°C
D4 D5 D6 D7 D8 D9 D10 D11: library part CMP-2000-05201-2, "LED RGB DIFFUSED CHIP SMD", Case Code (Imperial)=0606, Case Code (Metric)=1616, Color=Blue, Forward Current=20mA, Forward Voltage=3.35V, Lens Color=White, Max Operating Temperature=80°C, Min Operating Temperature=-20°C, Package Quantity=3000, Reverse Voltage=5V, Case/Package=0606, Depth=1.6mm, Dominant Wavelength=470nm, Height=0.35mm, Lead Free="Lead Free", Length=1.6mm, Lens Style=Diffused, Lens Transparency=Diffused, Luminous Intensity=180mcd, Mount="Surface Mount", Number of Elements=3, Number of LEDs=3, Number of Pins=4, Packaging="Tape and Reel", Radiation Hardening=No, Test Current=20mA, Viewing Angle=130°, Width=1.6mm
F1: library part CMP-00287-21220537-1, "ERB-RE1R00V Fuse Chip Fast Acting 1A 32V SMD Solder Pad 0603 1.6 X 0.8 X 0.54mm T/R UL/cUL", Case Code (Imperial)=0603, Case Code (Metric)=1608, Current=1A, Max Operating Temperature=125°C, Max Voltage Rating (DC)=32V, Min Operating Temperature=-40°C, Resistance=125mΩ, Approvals=UL, Body Material=Alumina, Case/Package=0603, Current Rating=1A, Depth=800µm, Fuse Current=1A, Height=640µm, Lead Free="Lead Free", Length=1.6mm, Lifecycle Status=Production, Mount="Surface Mount", Number of Pins=2, Packaging="Cut Tape", Radiation Hardening=No, REACH SVHC="No SVHC", RoHS=Compliant, Voltage Rating=32V, Voltage Rating (DC)=32V, Width=800µm
FB1: library part CMP-0686-00252-4, "Chip Ferrite Bead, 0402, 600Ω @ 100MHz, 0.23Ω, 25%, 900mA", Case Code (Imperial)=0402, Case Code (Metric)=1005, Current Rating=900mA, DC Resistance (DCR)=230mR, Max Operating Temperature=125°C, Min Operating Temperature=-55°C, Package Quantity=10000, Test Frequency=100MHz, Tolerance=25%, Case/Package=0402, Height=0.5mm, Impedance=600R, Lead Free="Lead Free", Length=1mm, Material=Steel, Max Current Rating=900mA, Max DC Current=900mA, Number of Circuits=1, Number of Lines=1, Number of Pins=2, Packaging="Tape and Reel", Termination=SMD/SMT, Width=0.5mm
J1: library part CMP-17439-000185-1, "Connector Header Surface Mount 10 position 0.049\" (1.25mm)", Color=Natural, Current Rating=1A, Max Operating Temperature=85°C, Min Operating Temperature=-25°C, Package Quantity=1, Voltage Rating=50V, Connector Type="Male Pin", Contact Material=Bronze, Contact Plating=Tin, Fastening Type=Latch, Housing Color=Natural, Housing Material=Nylon, Lead Free="Lead Free", Mount="Surface Mount", Number of Contacts=10, Number of Positions=10, Number of Rows=1, Orientation=Straight, Packaging="Tape and Reel", Pitch=1.25mm, REACH SVHC="No SVHC", Series=GH, Termination=SMD/SMT, Voltage Rating (AC)=50V, Wire/Cable Gauge=26AWG
Q1: library part CMP-00461-12441635-1, "DMP2123L-7 P-Channel 20 V 72 mO Surface Mount Enhancement Mode Mosfet - SOT-23", Case/Package=SOT-23-3, Continuous Drain Current (ID)=-3A, Drain to Source Breakdown Voltage=-20V, Drain to Source Resistance=51mΩ, Gate to Source Voltage (Vgs)=12V, Input Capacitance=443pF, Max Junction Temperature (Tj)=150°C, Max Power Dissipation=1.4W, Min Operating Temperature=-55°C, Resistance=72mΩ, Drain to Source Voltage (Vdss)=-20V, Element Configuration=Single, Fall Time=41ns, Height=1.1mm, Lead Free="Lead Free", Length=2.9mm, Max Operating Temperature=150°C, Mount="Surface Mount", NexarPartId=12441635, Number of Channels=1, Number of Elements=1, Number of Pins=3, Power Dissipation=1.4W, Radiation Hardening=No, Rds On Max=72mΩ, REACH SVHC="No SVHC", Rise Time=20ns, RoHS=Compliant, Schedule B="8541290080, 8541290080", Turn-Off Delay Time=38ns, Turn-On Delay Time=12ns, Weight=7.994566mg, Width=1.3mm
Q2: library part CMP-2000-05968-1, "N-Channel Enhancement Mode Mosfet, 50 V, 200 mA, -55 to 150 degC, 6-Pin SOT-323, RoHS, Tape and Reel", Id - Continuous Drain Current=200mA, Manufacturer=DiodesIncorporated, Maximum Operating Temperature=+150C, Minimum Operating Temperature=-55C, Package / Case=SOT-323-3, Package Description="3-Pin Small Outline Transistor, Body 2 x 1.25 mm, Pitch 0.65 mm", Package Reference=SOT323, Pd - Power Dissipation=200mW, Rds On - Drain-Source Resistance=1.4Ohms, Vds - Drain-Source Breakdown Voltage=75V, Vgs - Gate-Source Voltage=20V, Brand=DiodesIncorporated, Channel Mode=Enhancement, Configuration=Single, Datasheet URL=http://www.diodes.com/_files/datasheets/ds30206.pdf, Datasheet Version="Rev. 11-2, 09/2013", Factory Pack Quantity=3000, Forward Transconductance - Min=0.1S, Height=1mm, Length=2.2mm, Manufacturer URL=http://www.diodes.com/, Mounting Style=SMD/SMT, Mounting Technology=SurfaceMount, Number of Channels=1Channel, Packaging=Reel, Product=MOSFETSmallSignal, Product Category=MOSFET, RoHS=True, Series=BSS138, Technology=Si, Transistor Polarity=N-Channel, Transistor Type=1N-Channel, Type=EnhancementModeFieldEffectTransistor, Typical Turn-Off Delay Time=20ns, Typical Turn-On Delay Time=20ns, Unit Weight=0.000212oz, Width=1.35mm
Q3 Q4 Q5 Q6: library part CMP-1259-00116-1, "Dual P-Channel Trench MOSFET, -50 V, -0.16 A, -55 to 150 degC, 6-Pin SOT363, Tape and Reel", Manufacturer="NXP Semiconductors", Automotive Qualified=Y, Channel Type=P, Code_JEITA=SC-88, ComponentLink1Description="Manufacturer URL", ComponentLink1URL=http://www.nxp.com/, ComponentLink2Description=Datasheet, ComponentLink2URL=http://www.nxp.com/documents/data_sheet/BSS84AKS.pdf, ComponentLink3Description="Package Specification", ComponentLink3URL=http://www.nxp.com/documents/outline_drawing/sot363_po.pdf, DatasheetVersion="Rev. 1", ID [max] (A)=-0.16, IDM [max] (A)=-0.64, Mounting Technology="Surface Mount", PackageDescription="6-Pin Small Outline Transistor Package, Body 2 x 1.25 mm, Pitch 0.65 mm", PackageReference=SOT363, PackageVersion="06-03-16, 03/2006", Packing="Tape & Reel", PartNumber=BSS84AKS,115, VDS [max] (V)=-50, VGSth [typ] (V)=-1.6
Q7 Q8: library part CMP-35916-000009-1, "MOSFET 2N-CH 60V 0.3A", Continuous Drain Current (ID)=300mA, Drain to Source Voltage (Vdss)=60V, Input Capacitance=40pF, Max Power Dissipation=285mW, FET Type="2 N-Channel", Mount="Surface Mount", Packaging="Tape and Reel", Rds On Max=1.5R
R1 R2 R4 R6 R7 R8 R9 R11 R13 R14 R15 R22 R23 R28 R29 R34 R35 R39 R43 R44 R46 R48: library part CMP-1012-00623-3, "Chip Resistor, 10 KOhm, +/- 1%, 0.1 W, -55 to 155 degC, 0603 (1608 Metric), RoHS, Tape and Reel", Case Code (Imperial)=0603, Case Code (Metric)=1608, Manufacturer=Panasonic, Max Operating Temperature=155degC, Max Power Dissipation=100mW, Min Operating Temperature=-55degC, Package Description="2-Pin Surface Mount Device, Body 1.6 x 0.85 mm", Package Quantity=1, Package Reference=603, Resistance=10KOhm, Temperature Coefficient=100ppm\/degreesC, Tolerance=1%, Voltage Rating=75V, Case\/Package=0603, Composition=ThickFilm, Contact Plating=Tin, Datasheet URL=https://industrial.panasonic.com/cdbs/www-data/pdf/RDA0000/AOA0000C304.pdf, Datasheet Version=02/2017, Depth=0.8mm, Height=0.45mm, Lead Free=LeadFree, Length=1.6mm, Manufacturer URL=http://www.panasonic.com/, Military Standard=Not, Mount=SurfaceMount, Mounting Technology=SurfaceMount, Number of Pins=2, Number of Terminations=2, Packaging=TapeandReel, Power Rating=100mW, Radiation Hardening=No, REACH SVHC=NoSVHC, RoHSCompliant=true, Termination=SMD/SMT, Voltage Rating (DC)=75V, Width=0.031inch
R3: library part CMP-2000-00317-1, Manufacturer=Panasonic, Part Number=ERJ-3EKF2001V
R12 R16 R20 R21 R26 R27 R32 R33 R38 R41 R42 R45 R47: library part CMP-2000-00180-1, Manufacturer=Panasonic, Part Number=ERJ-3EKF1001V
R17: library part CMP-2000-00213-2, "Chip Resistor, 120 Ohm, +/- 1%, 0.1 W, -55 to 155 degC, 0603 (1608 Metric), RoHS, Tape and Reel", Case Code (Imperial)=0603, Case Code (Metric)=1608, Manufacturer=Panasonic, Max Operating Temperature=155degC, Max Power Dissipation=100mW, Min Operating Temperature=-55degC, Package Description="2-Pin Surface Mount Device, Body 1.6 x 0.85 mm", Package Quantity=1, Resistance=120Ohm, Temperature Coefficient=100ppm/degreesC, Tolerance=1%, Voltage Rating=75V, Case/Package=0603, Composition=ThickFilm, Contact Plating=Tin, Datasheet URL=https://industrial.panasonic.com/cdbs/www-data/pdf/RDA0000/AOA0000C283.pdf, Datasheet Version=42095.0, Depth=0.8mm, Height=0.022inch, Lead Free=LeadFree, Length=1.6mm, Manufacturer URL=http://www.panasonic.com/, Military Standard=Not, Mount=SurfaceMount, Number of Pins=2, Number of Terminations=2, Package Reference=0603, Package URL=http://www.st.com/st-web-ui/static/active/en/resource/technical/document/datasheet/CD00001320.pdf, Packaging=TapeandReel, Power Rating=100mW, Radiation Hardening=No, REACH SVHC=NoSVHC, RoHSCompliant=true, Termination=SMD/SMT, Voltage Rating (DC)=75V, Width=0.031inch
R24 R25 R30 R31 R36 R37 R40 R49: library part CMP-2000-00687-1, Manufacturer=Panasonic, Part Number=ERJ-3EKF91R0V
SW1_SWITCH1 SW1_SWITCH2 SW1_SWITCH3 SW1_SWITCH4 SW1_SWITCH5 SW1_SWITCH6 SW1_SWITCH7 SW1_SWITCH8: library part CMP-10040-000023-1, "SWITCH TACTILE SPST-NO 0.05A 32V", Contact Current Rating=50mA, Max Operating Temperature=85°C, Max Voltage Rating (DC)=32V, Min Operating Temperature=-40°C, Operating Force=1.2N, Package Quantity=1, Power Rating=1W, Actuator Length=0.5mm, Actuator Type=Standard, Contact Material=Silver, Contact Plating=Silver, Current Rating=50mA, Depth=4.6mm, Illumination Type=Non-Illuminated, Lead Free="Lead Free", Length=2.8mm, Max Current Rating=50mA, Mechanical Life=200000Cycles, Mount="Surface Mount", Orientation=Straight, Packaging="Tape and Reel", Radiation Hardening=No, REACH SVHC="No SVHC", Switch Function=Off-Mom, Switch Travel=0.2mm, Termination="Gull Wing", Throw Configuration=SPST, Voltage Rating (DC)=32V, Width=2.8mm
TP1 TP2 TP3 TP4 TP5 TP6: library part CMP-00028-00002-3, "0.6mm round", Pins=1
U1: library part CMP-020-00017-1, "IC MCU 32BIT 32KB FLASH 48LQFP", RoHS Compliant=Yes
U2: library part CMP-019-00039-1, "LDO Regulator Pos 3.3V 0.3A 3-Pin SOT-23 T/R"
U3: library part CMP-019-00041-1, "Ldo Cmos Lowcurr SOT23 T&r 3K"
U5: library part CMP-015-00012-2, "Automotive CAN FD transceiver with watchdog, bus diagnostics and partial networking via sele 14-SOT-23-THIN -40 to 150"
Y1: library part CMP-27762-011708-1, "Crystal 48MHz ±20ppm 18pF SMD-4 3.2mm x 2.5mm", Case/Package=CSMD, ESR (Equivalent Series Resistance)=35R, Frequency=48MHz, Frequency Stability=50ppm, Frequency Tolerance=20ppm, Load Capacitance=18pF, Max Operating Temperature=70°C, Min Operating Temperature=-20°C, Operating Frequency="48 MHz", Package Quantity=1000, Resistor Type=Ceramic, Depth=2.5mm, Height=0.031inch, Lead Free="Lead Free", Length=3.2mm, Mount="Surface Mount", Number of Pins=4, Packaging="Tape and Reel", Radiation Hardening=No, REACH SVHC="No SVHC", RoHS Compliant=Yes, Series=ABM8, Series Resistance=35R, Termination=SMD/SMT, Tolerance=20ppm, Width=0.098inch
Y2: library part CMP-40224-000006-1, "CRYSTAL 32.7680KHZ 12.5PF SMD", Frequency=32.768kHz, Load Capacitance=12.5pF, Manufacturer="ECS International", Package=ECX-1210, Temperature="-40°C to +85°C", Temperature Range High=+85°C, Temperature Range Low=-40°C, Tolerance=20ppm, Automotive=No, Category=Crys, ComponentLink2Description=Datasheet, ComponentLink2URL=https://ecsxtal.com/store/pdf/ECX-1210.pdf, Device Class L1="Passive Components", Device Class L2="Crystals / Oscillators", Device Class L3=Crystals, Digikey Description="CRYSTAL 32.7680KHZ 12.5PF SMD", Esr=90kΩ, Height=0.5mm, Lead Free=Yes, Manufacturer Part Number=ECS-.327-12.5-1210-TR, Octopart=https://octopart.com/ecs-.327-12.5-1210-tr-ecs+international-81221340, RoHS=TRUE, Series=ECX-1210

## Free pads (board coordinates)
  rrect50% 0.5x0.5 / inner round 0.5 / far side round 0.5 hole 3 slot 4 at 45 deg rot 45: 22(14,12)
  round 0.5 hole 3: 23(33,28)

## Via types
v1: diameter 0.5, hole 0.3, Top Layer to Bottom Layer, 130 vias